# Altium PCB er9x.PcbDoc (part 2 of 2)
Units mm, origin at the board's own origin, x right, y up, seen from the top; angles counter-clockwise.
Board outline 182 x 126 mm, 2 copper layers (Top Layer, Bottom Layer); 144 components, 111 nets, 454 pads, 137 vias.
Unrouted connection lines stored in the file: 3.
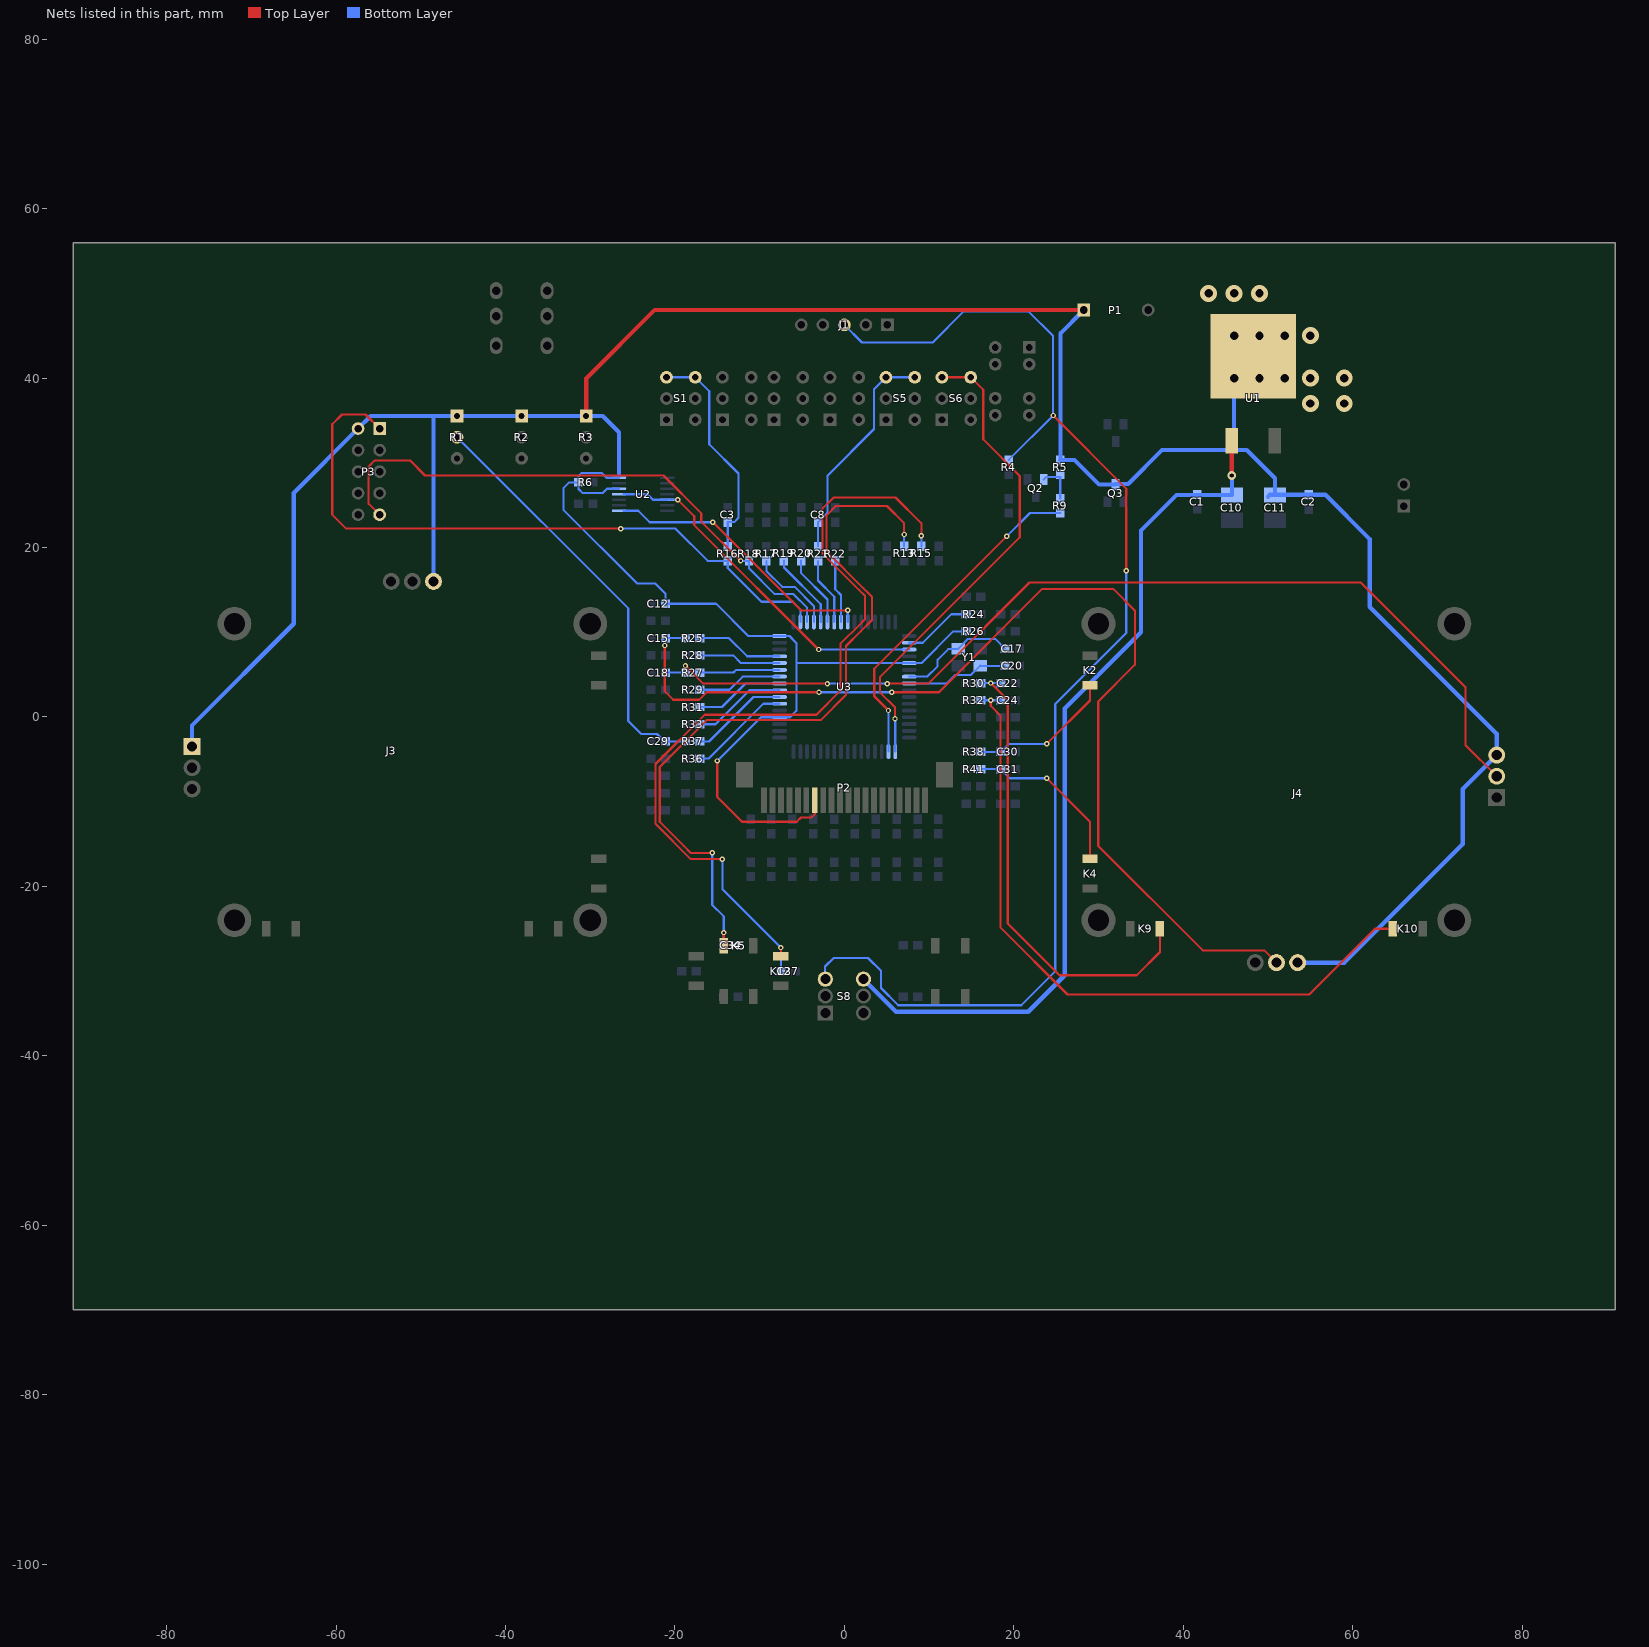
[diagram p2: the nets of this part, all layers, seen from the top]

## Via types
v1: diameter 0.635, hole 0.305, Top Layer to Bottom Layer, 83 vias
v2: diameter 0.635, hole 0.305, Top Layer to Bottom Layer, tented both sides, 33 vias
v3: diameter 2, hole 1, Top Layer to Bottom Layer, tented both sides, 13 vias
v4: diameter 4, hole 3, Top Layer to Bottom Layer, 4 vias
v5: diameter 2, hole 1.7, Top Layer to Bottom Layer, 2 vias
v6: diameter 1.016, hole 0.508, Top Layer to Bottom Layer, 1 vias
v7: diameter 2, hole 1, Top Layer to Bottom Layer, 1 vias

## Nets (pads, with @x,y where several pads share a name; then routed paths per layer and width w, separated by ;. In a path a pad name is that pad's centre, name@x,y a point inside that pad or via, vN(x,y) a via of type N, cw(c..) or ccw(c..) an arc to the next point about the centre after c; other vN are vias at no path point) (continued)
PE0: P3.1 R16.1 U3.2 | length 79.3
  Top Layer w0.254: P3.1@-54.864,34.036 -56.52,35.692 -59.304,35.692 -60.452,34.544 -60.452,23.876 -58.801,22.225 v1(-26.416,22.225)
  Bottom Layer w0.254: v1(-26.416,22.225) -19.939,22.225 -16.136,18.422 R16.1@-13.772,18.422 -13.772,17.582 -9.779,13.589 -6.096,13.589 -5.2,12.693 U3.2@-5.2,11.206
PE1: P3.9 R18.1 U3.3 | length 68.3
  Top Layer w0.254: P3.9@-54.864,23.876 -56.159,25.171 -56.159,29.565 -55.438,30.286 -51.286,30.286 -49.5,28.5 -21.363,28.5 -16.891,24.028 -16.891,23.06 v1(-12.257,18.426)
  Bottom Layer w0.254: v1(-12.257,18.426) R18.1@-11.261,18.426 -11.261,17.535 -8.226,14.5 -6,14.5 -4.4,12.9 U3.3@-4.4,11.206
PE2: R17.1 U3.4 | length 10.4
  Bottom Layer w0.254: R17.1@-9.204,18.426 -9.204,17.204 -7.353,15.353 -5.853,15.353 -3.6,13.1 U3.4@-3.6,11.206
PE3: R19.1 U3.5 | length 9
  Bottom Layer w0.254: R19.1@-7.136,18.454 -7.136,17.636 -2.8,13.3 U3.5@-2.8,11.206
PE4: R20.1 U3.6 | length 8.5
  Bottom Layer w0.254: R20.1@-5.104,18.454 -5.104,16.971 -2,13.867 U3.6@-2,11.206
PE5: R21.1 U3.7 | length 8
  Bottom Layer w0.254: R21.1@-3.108,18.426 -3.108,16.108 -1.2,14.2 U3.7@-1.2,11.206
PE6: R22.1 U3.8 | length 7.5
  Bottom Layer w0.254: R22.1@-1.076,18.426 -1.076,15.076 -0.4,14.4 U3.8@-0.4,11.206
PE7: U2.8 U3.9 | length 32.7
  Top Layer w0.254: v1(-15.519,22.987) -5.105,12.573 v1(0.381,12.573)
  Bottom Layer w0.254: U2.8@-26.091,24.339 -24.339,24.339 -22.987,22.987 v1(-15.519,22.987) ; v1(0.381,12.573) 0.4,12.554 U3.9@0.4,11.206
PF0: R25.1 U3.61 | length 10.3
  Bottom Layer w0.254: R25.1@-17.062,9.3 -13.618,9.3 -11.474,7.156 U3.61@-7.65,7.156
PF1: R28.1 U3.60 | length 9.8
  Bottom Layer w0.254: R28.1@-17.062,7.268 -13.11,7.268 -12.198,6.356 U3.60@-7.65,6.356
PF2: R27.1 U3.59 | length 9.5
  Bottom Layer w0.254: R27.1@-17.062,5.236 -13.081,5.236 -12.761,5.556 U3.59@-7.65,5.556
PF3: R29.1 U3.58 | length 10.1
  Bottom Layer w0.254: R29.1@-17.062,3.204 -13.56,3.204 -12.008,4.756 U3.58@-7.65,4.756
PF4: R31.1 U3.57 | length 10.6
  Bottom Layer w0.254: R31.1@-17.062,1.172 -14.449,1.172 -11.665,3.956 U3.57@-7.65,3.956
PF5: R33.1 U3.56 | length 11.1
  Bottom Layer w0.254: R33.1@-17.062,-0.86 -15.211,-0.86 -11.195,3.156 U3.56@-7.65,3.156
PF6: R37.1 U3.55 | length 11.6
  Bottom Layer w0.254: R37.1@-17.062,-2.892 -15.973,-2.892 -10.725,2.356 U3.55@-7.65,2.356
PF7: R36.1 U3.54 | length 12.1
  Bottom Layer w0.254: R36.1@-17.062,-4.924 -16.049,-4.924 -9.569,1.556 U3.54@-7.65,1.556
PG0: S6.3 U3.33 | length 57.6
  Top Layer w0.254: v1(5.969,-0.223) 5.969,1.143 4.191,2.921 4.191,4.699 20.701,21.209 20.701,28.448 16.383,32.766 16.383,38.617 S6.3@14.908,40.092 S6.3@11.508,40.092
  Bottom Layer w0.254: v1(5.969,-0.223) v1@6,-0.254 ; U3.33@6,-4.094 v1@6,-0.254 ; v1@6,-0.223 v1@6,-0.254
PG1: R9.2 U3.34 | length 40.1
  Top Layer w0.254: 3.524,2.406 3.524,5.683 ; 3.524,5.715 3.524,5.683 ; 3.556,2.406 v1(5.2,0.762) ; v1(19.177,21.336) 3.524,5.683
  Bottom Layer w0.254: U3.34@5.2,-4.094 v1(5.2,0.762) ; v1(19.177,21.336) 21.909,24.068 R9.2@25.488,24.068
PG3: R24.2 U3.18 | length 8.1
  Bottom Layer w0.254: U3.18@7.65,8.756 9.256,8.756 12.628,12.128 R24.2@14.39,12.128
PG4: U2.5 U2.11 U3.19 | length 42
  Top Layer w0.254: v1(-19.685,25.654) -17.729,23.698 -17.729,22.637 v1(-3.048,7.956)
  Bottom Layer w0.254: U2.11@-26.091,26.289 -23.241,26.289 -22.591,25.639 U2.5@-20.899,25.639 ; U2.5@-20.899,25.654 U2.5@-20.406,25.654 ; U2.5@-20.391,25.639 U2.5@-20.406,25.654 ; v1(-19.685,25.654) U2.5@-20.406,25.654 ; v1(-3.048,7.956) U3.19@7.65,7.956
PITTRIM: C29.1 R1.2 R37.2 | length 49.6
  Bottom Layer w0.254: R1.2@-45.72,33.02 -25.516,12.816 -25.516,-0.484 -23.989,-2.011 -22.118,-2.011 -21.237,-2.892 C29.1@-21.126,-2.892 R37.2@-18.762,-2.892
RF_IN: Q2.2 R5.2 R9.1 | length 4.6
  Bottom Layer w0.254: Q2.2@23.533,28.026 23.827,28.321 25.488,28.321 R9.1@25.488,25.768
RF_PWR: J1.3 R4.2 S8.3 | length 152
  Top Layer w0.254: v1(24.638,35.586) 33.274,26.95 v1(33.274,17.272)
  Bottom Layer w0.254: S8.3@-2.286,-30.988 -2.286,-29.464 -1.27,-28.448 2.794,-28.448 4.318,-29.972 4.318,-32.004 6.35,-34.036 20.889,-34.036 24.892,-30.033 24.892,1.524 33.274,9.906 v1(33.274,17.272) ; J1.3@0,46.279 2.083,44.196 10.414,44.196 14.097,47.879 21.717,47.879 24.638,44.958 v1(24.638,35.586) R4.2@19.392,30.34
RHSTICK: C15.1 J4.5 R25.2 | length 127.4
  Top Layer w0.254: v1(-21.209,8.436) -21.209,3.048 -20.197,2.036 -17.145,2.036 -16.26,2.921 v1(-3,2.921) ; v1(5.588,2.921) 11.176,2.921 23.368,15.113 31.75,15.113 34.29,12.573 34.29,6.147 29.972,1.829 29.972,-15.24 42.291,-27.559 49.559,-27.559 J4.5@51,-29
  Bottom Layer w0.254: v1(-21.209,8.436) -21.209,9.217 C15.1@-21.126,9.3 R25.2@-18.762,9.3 ; v1(-3,2.921) v1(5.588,2.921)
RHTRIMDWN: C24.1 K10.1 R32.2 | length 82.5
  Top Layer w0.254: v1(17.272,1.968) 17.272,1.321 18.415,0.178 18.415,-24.841 26.34,-32.766 54.864,-32.766 62.63,-25 K10.1@64.75,-25
  Bottom Layer w0.254: R32.2@16.09,1.968 v1(17.272,1.968) C24.1@18.454,1.968
RHTRIMUP: C22.1 K9.2 R30.2 | length 56
  Top Layer w0.254: v1(17.272,4) 19.279,1.993 19.279,-24.384 25.395,-30.5 34.5,-30.5 37.25,-27.75 K9.2@37.25,-25
  Bottom Layer w0.254: R30.2@16.09,4 v1(17.272,4) C22.1@18.454,4
RIGHT: C37.2 K12.1 R15.1 | length 101.8
  Top Layer w0.254: v1(-14.402,-16.786) -18.117,-16.786 -22.301,-12.602 -22.301,-5.559 -16.488,0.254 -3.302,0.254 -0.476,3.08 -0.476,8.624 1.8,10.9 ; K12.1@-7.5,-28.25 v1(-7.5,-27.222) ; 2.3,11.4 1.8,10.9 ; 2.3,14.42 1.756,14.964 ; v1(9.088,21.392) 9.088,22.86 6.04,25.908 -1.27,25.908 -2.6,24.578 -2.6,19.32 1.756,14.964 ; 1.756,14.964 2.434,14.286 2.434,11.534 1.8,10.9
  Bottom Layer w0.254: v1(-14.402,-16.786) -14.402,-20.32 v1(-7.5,-27.222) -7.5,-29.926 C37.2@-7.378,-30.048 ; R15.1@9.088,20.154 v1(9.088,21.392)
RVSTICK: C18.1 J4.2 R27.2 | length 118.2
  Top Layer w0.254: v1(-18.762,6.04) -16.659,3.937 v1(-2,3.937) ; v1(5.08,3.937) 9.906,3.937 21.844,15.875 60.96,15.875 73.304,3.531 73.304,-3.304 J4.2@77,-7
  Bottom Layer w0.254: C18.1@-21.126,5.236 R27.2@-18.762,5.236 v1(-18.762,6.04) ; v1(-2,3.937) v1(5.08,3.937)
RVTRIMDWN: C31.1 K4.2 R41.2 | length 19.9
  Top Layer w0.254: v1(23.876,-7.239) 29,-12.363 K4.2@29,-16.75
  Bottom Layer w0.254: R41.2@16.09,-6.16 C31.1@18.454,-6.16 19.533,-7.239 v1(23.876,-7.239)
RVTRIMUP: C30.1 K2.1 R38.2 | length 17.2
  Top Layer w0.254: v1(23.876,-3.175) 29,1.949 K2.1@29,3.75
  Bottom Layer w0.254: R38.2@16.09,-4.128 C30.1@18.454,-4.128 19.407,-3.175 v1(23.876,-3.175)
TCUTSW: C3.1 R16.2 S1.3 | length 26.5
  Bottom Layer w0.254: S1.3@-21.004,40.092 S1.3@-17.604,40.092 -15.951,38.439 -15.951,32.187 -12.497,28.732 -12.497,23.495 -12.998,22.994 C3.1@-13.665,22.994 ; R16.2@-13.772,20.122 -13.772,22.887 C3.1@-13.665,22.994 ; C3.1@-13.772,22.994 C3.1@-13.665,22.994
TRAINSW: C8.1 R21.2 S5.3 | length 26.7
  Bottom Layer w0.254: R21.2@-3.104,20.13 C8.1@-3.104,22.994 -2,24.098 -2,28.48 3.5,33.98 3.5,38.688 S5.3@4.904,40.092 S5.3@8.304,40.092
UP: C34.2 K5.1 R13.1 | length 92.5
  Top Layer w0.254: v1(-15.596,-16.053) -18.132,-16.053 -18.982,-15.203 -21.793,-12.391 -21.793,-5.918 -16.256,-0.381 -2.794,-0.381 0.191,2.603 0.191,8.364 1.946,10.12 ; K5.1@-14.25,-27 v1(-14.25,-25.451) ; 2.808,10.982 1.946,10.12 ; 2.808,14.631 2.242,15.196 ; v1(7.056,21.534) 7.056,22.86 5.024,24.892 -1.016,24.892 -2.092,23.816 -2.092,19.531 2.242,15.196 ; 1.946,10.12 3.268,11.442 3.268,14.171 2.242,15.196
  Bottom Layer w0.254: v1(-15.596,-16.053) -15.596,-22.2 -14.25,-23.545 v1(-14.25,-25.451) ; C34.2@-14.261,-26.924 v1@-14.261,-25.463 ; R13.1@7.056,20.154 v1(7.056,21.534)
VBAT: C1.1 C10.1 S8.6 U1.1 | length 102.5
  Top Layer w0.508: v6(45.72,28.5) U1.1@45.72,32.592
  Bottom Layer w0.508: S8.6@2,-31 2.101,-31.101 2.399,-31.101 6.096,-34.798 21.702,-34.798 26,-30.5 26,1 35,10 35,22 39.208,26.208 C10.1@45.749,26.208 45.749,28.471 v6(45.72,28.5)
VCC: C2.1 C11.1 C12.1 J3.1 J3.6 J4.3 J4.4 P1.1 P2.7 P3.2 Q3.3 R1.1 R2.1 R3.1 R5.1 R6.1 R26.2 U1.2 U2.12 U2.14 U3.21 U3.52 U3.64 | length 423.1
  Top Layer w0.254: v1(-15,-5.196) -15,-9.46 -12.09,-12.37 -5.611,-12.37 -5.115,-11.874 -3.899,-11.874 -3.5,-11.476 P2.7@-3.5,-9.831
  Top Layer w0.508: R3.1@-30.48,35.52 -30.48,39.954 -22.403,48.031 P1.1@28.255,48.031
  Bottom Layer w0.254: -28.245,28.397 -28.384,28.537 ; U2.12@-26.599,26.939 -28.027,26.939 -28.55,26.416 -30.886,26.416 -31.378,26.908 R6.1@-31.378,27.686 ; U2.14@-26.599,28.239 -28.087,28.239 -28.384,28.537 ; v1(-15,-5.196) -9.848,-0.044 U3.52@-7.65,-0.044 -6.419,-0.044 -5.664,0.711 -5.664,6.413 -5.664,8.738 -6.483,9.556 U3.64@-7.65,9.556 -11.334,9.556 -15.142,13.364 C12.1@-21.126,13.364 -21.126,14.547 -22.327,15.748 -24.46,15.748 -33.172,24.46 -33.172,26.987 -32.474,27.686 R6.1@-31.378,27.686 ; -5.607,6.356 U3.21@7.65,6.356 9.106,6.356 12.846,10.096 R26.2@14.39,10.096 ; R6.1@-31.378,27.686 -31.378,28.42 -30.988,28.81 -28.658,28.81 -28.384,28.537
  Bottom Layer w0.508: J3.1@-77,-3.5 -77,-1 -65,11 -65,26.44 P3.2@-57.404,34.036 -55.92,35.52 -48.5,35.52 ; J3.6@-48.5,16 -48.5,35.52 ; -26.599,28.448 -26.599,33.599 -28.52,35.52 R3.1@-30.48,35.52 R2.1@-38.1,35.52 R1.1@-45.72,35.52 -48.5,35.52 ; R5.1@25.488,30.34 R5.1@25.5,30.34 ; P1.1@28.255,48.031 25.5,45.277 R5.1@25.5,30.34 ; Q3.3@31.991,27.432 30.068,27.432 27.16,30.34 R5.1@25.5,30.34 ; Q3.3@32,27.5 33.5,27.5 37.5,31.5 45.974,31.5 ; v3(46,40) 46,31.526 45.974,31.5 ; C11.1@50,26 50.225,26.225 C11.1@50.829,26.225 ; C11.1@50.829,26.208 C11.1@50.829,26.225 ; J4.4@53.5,-29 59,-29 73,-15 73,-8.5 J4.3@77,-4.5 77,-2 62,13 62,21 56.775,26.225 54.896,26.225 C2.1@54.828,26.225 C11.1@50.829,26.225 ; 45.974,31.5 47.5,31.5 50.829,28.171 C11.1@50.829,26.225
  other v3: 55,37 59,37 49,40 52,40 55,40 59,40 49,45 52,45 55,45 43,50 46,50 49,50
  other v7: 46,45
X1: C20.1 U3.24 Y1.1 | length 12.2
  Bottom Layer w0.254: U3.24@7.65,3.956 12.084,3.956 13.095,4.967 14.951,4.967 Y1.1@16.032,6.048 ; Y1.1@16.048,6.032 C20.1@18.962,6.032
X2: C17.2 U3.23 Y1.3 | length 14.1
  Bottom Layer w0.254: U3.23@7.65,4.756 9.756,4.756 11,6 11,6.75 12.25,8 13.384,8 Y1.3@13.432,8.048 14.599,9.215 17.811,9.215 C17.2@18.962,8.064
pads on no net: J2.2 J3.0 J4.0 P2.0 P2.1 P2.2 P2.3 P2.4 S1.1 S2.1 S3.1 S4.1 S5.1 S6.1 S7.3 S8.1 U3.1 U3.35 U3.41 U3.42 U3.43 Y1.2 Y1.4
copper on no net: | length 13.9
  Bottom Layer w0.254: 34.103,10.001 34.103,23.943
  other v4: -22.652,-16.425 22.348,-16.425 -22.652,18.575 22.348,18.575
  other v5: -38.1,43.824 -38.1,49.824

## Polygon pours and split planes (outlines as drawn)
GND on Top Layer "Mid-Layer 2-No Net" (solid, remove dead copper, pour order 1000): -91,-70 91,-70 91,56 -91,56
VCC on Top Layer "Mid-Layer 2-No Net" (solid, remove dead copper, pour order 1001): 41,55 69,55 69,35 41,35 41,55
GND on Bottom Layer "Mid-Layer 2-No Net" (solid, remove dead copper, pour order 1002): -91,-70 91,-70 91,56 -91,56
VCC on Bottom Layer "Mid-Layer 2-No Net" (solid, remove dead copper, pour order 1003): 41,55 69,55 69,35 41,35 41,55
VCC on Top Solder "Mid-Layer 2-No Net" (solid): 41,55 69,55 69,35 41,35 41,55
VCC on Bottom Solder "Mid-Layer 2-No Net" (solid): 41,55 69,55 69,35 41,35 41,55

## Keep-outs
Keep-Out Layer:
  circle w0.064: c-90.291,-70.115 r0.032
  lines w0.127: -89.968,-45.702 -89.965,-46.057 -89.96,-46.411 -89.952,-46.765 -89.941,-47.12 -89.927,-47.473 -89.911,-47.827 -89.892,-48.18 -89.869,-48.533 -89.844,-48.886 -89.816,-49.238 -89.784,-49.59 -89.749,-49.941 -89.711,-50.292 -89.67,-50.643 -89.625,-50.994 -89.577,-51.343 -89.525,-51.693 -89.47,-52.042 -89.411,-52.39 -89.348,-52.739 -89.282,-53.086 -89.212,-53.433 -89.138,-53.779 -89.06,-54.125 -88.978,-54.47 -88.892,-54.814 -88.802,-55.157 -88.708,-55.499 -88.61,-55.84 -88.507,-56.18 -88.401,-56.519 -88.29,-56.857 -88.175,-57.194 -88.055,-57.529 -87.931,-57.863 -87.802,-58.195 -87.669,-58.526 -87.531,-58.855 -87.389,-59.183 -87.242,-59.509 -87.09,-59.834 -86.933,-60.156 -86.772,-60.477 -86.605,-60.796 -86.434,-61.113 -86.257,-61.427 -86.076,-61.74 -85.889,-62.051 -85.698,-62.359 -85.501,-62.665 -85.299,-62.968 -85.092,-63.267 -84.88,-63.563 -84.662,-63.856 -84.44,-64.144 -84.213,-64.429 -83.98,-64.708 -83.743,-64.983 -83.501,-65.252 -83.253,-65.516 -83.001,-65.774 -82.743,-66.026 -82.481,-66.272 -82.214,-66.511 -81.942,-66.743 -81.665,-66.968 -81.383,-67.185 -81.096,-67.395 -80.804,-67.596 -80.508,-67.789 -80.206,-67.974 -79.9,-68.149 -79.589,-68.315 -79.273,-68.472 -78.952,-68.618 -78.627,-68.755 -78.298,-68.883 -77.964,-69.001 -77.627,-69.109 -77.286,-69.208 -76.942,-69.298 -76.595,-69.379 -76.245,-69.452 -75.892,-69.515 -75.538,-69.57 -75.181,-69.616 -74.822,-69.653 -74.462,-69.683 -74.101,-69.704 -73.738,-69.717 -73.375,-69.722 -73.011,-69.719 -72.646,-69.709 -72.282,-69.691 -71.918,-69.665 -71.554,-69.632 -71.191,-69.592 -70.829,-69.545 -70.468,-69.49 -70.109,-69.428 -69.752,-69.359 -69.397,-69.283 -69.044,-69.199 -68.695,-69.107 -68.349,-69.007 -68.007,-68.899 -67.669,-68.783 -67.336,-68.658 -67.007,-68.525 -66.684,-68.383 -66.367,-68.232 -66.056,-68.072 -65.751,-67.902 -65.453,-67.724 -65.163,-67.536 -64.879,-67.338 -64.603,-67.132 -64.332,-66.917 -64.068,-66.694 -63.811,-66.463 -63.559,-66.224 -63.312,-65.978 -63.071,-65.726 -62.835,-65.467 -62.603,-65.202 -62.377,-64.931 -62.154,-64.654 -61.936,-64.373 -61.721,-64.087 -61.51,-63.796 -61.302,-63.501 -61.097,-63.203 -60.895,-62.901 -60.696,-62.597 -60.499,-62.289 -60.304,-61.979 -60.111,-61.668 -59.919,-61.354 -59.728,-61.04 -59.539,-60.724 -59.35,-60.408 -59.162,-60.092 -58.974,-59.776 -58.787,-59.46 -58.599,-59.145 -58.41,-58.832 -58.221,-58.52 -58.031,-58.209 -57.841,-57.9 -57.649,-57.592 -57.457,-57.286 -57.264,-56.981 -57.07,-56.678 -56.875,-56.376 -56.679,-56.075 -56.483,-55.776 -56.285,-55.479 -56.087,-55.182 -55.887,-54.887 -55.687,-54.593 -55.486,-54.301 -55.284,-54.01 -55.08,-53.72 -54.876,-53.431 -54.671,-53.143 -54.464,-52.857 -54.257,-52.572 -54.048,-52.288 -53.839,-52.005 -53.628,-51.723 -53.416,-51.442 -53.203,-51.163 -52.989,-50.884 -52.773,-50.606 -52.556,-50.33 -52.339,-50.054 -52.119,-49.78 -51.899,-49.506 -51.677,-49.233 -51.455,-48.961 -51.23,-48.69 -51.005,-48.42 -50.778,-48.151 -50.55,-47.883 -50.32,-47.615 -50.089,-47.349 -49.857,-47.083 -49.623,-46.818 -49.388,-46.554 -49.151,-46.291 -48.912,-46.029 -48.672,-45.769 -48.431,-45.51 -48.187,-45.252 -47.942,-44.995 -47.696,-44.74 -47.447,-44.487 -47.197,-44.235 -46.945,-43.985 -46.691,-43.736 -46.435,-43.489 -46.178,-43.244 -45.918,-43.001 -45.656,-42.76 -45.393,-42.521 -45.127,-42.284 -44.859,-42.049 -44.59,-41.817 -44.318,-41.586 -44.043,-41.359 -43.767,-41.133 -43.488,-40.91 -43.207,-40.689 -42.924,-40.471 -42.639,-40.256 -42.351,-40.043 -42.06,-39.834 -41.768,-39.627 -41.472,-39.423 -41.175,-39.222 -40.874,-39.025 -40.572,-38.832 -40.267,-38.643 -39.959,-38.459 -39.649,-38.28 -39.337,-38.106 -39.022,-37.939 -38.705,-37.777 -38.385,-37.622 -38.063,-37.473 -37.738,-37.332 -37.412,-37.198 -37.082,-37.072 -36.75,-36.955 -36.416,-36.846 -36.08,-36.746 -35.741,-36.655 -35.4,-36.572 -35.057,-36.497 -34.712,-36.429 -34.365,-36.368 -34.017,-36.314 -33.667,-36.266 -33.315,-36.224 -32.962,-36.187 -32.608,-36.154 -32.252,-36.126 -31.896,-36.103 -31.538,-36.082 -31.18,-36.065 -30.821,-36.05 -30.462,-36.037 -30.102,-36.026 -29.742,-36.017 -29.381,-36.008 -29.02,-36 0,-36 29.02,-36 29.381,-36.008 29.741,-36.017 30.102,-36.026 30.462,-36.037 30.821,-36.05 31.18,-36.065 31.538,-36.082 31.896,-36.103 32.252,-36.126 32.608,-36.154 32.962,-36.187 33.315,-36.224 33.666,-36.266 34.017,-36.314 34.365,-36.368 34.712,-36.429 35.057,-36.497 35.4,-36.572 35.741,-36.655 36.08,-36.746 36.416,-36.846 36.75,-36.955 37.082,-37.072 37.411,-37.198 37.738,-37.332 38.063,-37.473 38.385,-37.622 38.705,-37.777 39.022,-37.939 39.337,-38.106 39.649,-38.28 39.959,-38.459 40.267,-38.643 40.572,-38.832 40.874,-39.025 41.175,-39.222 41.472,-39.423 41.767,-39.627 42.06,-39.834 42.351,-40.043 42.639,-40.256 42.924,-40.471 43.207,-40.689 43.488,-40.91 43.767,-41.133 44.043,-41.359 44.317,-41.586 44.589,-41.817 44.859,-42.049 45.127,-42.284 45.393,-42.521 45.656,-42.76 45.918,-43.001 46.178,-43.244 46.435,-43.489 46.691,-43.736 46.945,-43.985 47.197,-44.235 47.447,-44.487 47.696,-44.74 47.942,-44.995 48.187,-45.252 48.43,-45.51 48.672,-45.769 48.912,-46.029 49.151,-46.291 49.387,-46.554 49.623,-46.818 49.857,-47.083 50.089,-47.349 50.32,-47.615 50.55,-47.883 50.778,-48.151 51.005,-48.42 51.23,-48.69 51.454,-48.961 51.677,-49.233 51.899,-49.506 52.119,-49.78 52.338,-50.054 52.556,-50.33 52.773,-50.606 52.988,-50.884 53.203,-51.163 53.416,-51.442 53.628,-51.723 53.838,-52.005 54.048,-52.288 54.257,-52.572 54.464,-52.857 54.671,-53.143 54.876,-53.431 55.08,-53.72 55.283,-54.01 55.486,-54.301 55.687,-54.593 55.887,-54.887 56.087,-55.182 56.285,-55.479 56.483,-55.776 56.679,-56.075 56.875,-56.376 57.07,-56.678 57.264,-56.981 57.457,-57.286 57.649,-57.592 57.84,-57.9 58.031,-58.209 58.221,-58.52 58.41,-58.832 58.599,-59.145 58.787,-59.46 58.974,-59.776 59.162,-60.092 59.35,-60.408 59.539,-60.724 59.728,-61.04 59.919,-61.354 60.11,-61.668 60.304,-61.979 60.499,-62.289 60.696,-62.597 60.895,-62.901 61.097,-63.203 61.302,-63.501 61.51,-63.796 61.721,-64.087 61.936,-64.373 62.154,-64.654 62.376,-64.931 62.603,-65.202 62.835,-65.467 63.071,-65.726 63.312,-65.978 63.558,-66.224 63.81,-66.463 64.068,-66.694 64.332,-66.917 64.602,-67.132 64.879,-67.338 65.163,-67.536 65.453,-67.724 65.751,-67.902 66.056,-68.072 66.367,-68.232 66.684,-68.383 67.007,-68.525 67.336,-68.658 67.669,-68.783 68.007,-68.899 68.349,-69.007 68.695,-69.107 69.044,-69.199 69.396,-69.283 69.752,-69.359 70.109,-69.428 70.468,-69.49 70.829,-69.545 71.191,-69.592 71.554,-69.632 71.918,-69.665 72.282,-69.691 72.646,-69.709 73.011,-69.719 73.374,-69.722 73.738,-69.717 74.1,-69.704 74.462,-69.683 74.822,-69.653 75.181,-69.616 75.538,-69.57 75.892,-69.515 76.245,-69.452 76.595,-69.379 76.942,-69.298 77.286,-69.208 77.627,-69.109 77.964,-69.001 78.298,-68.883 78.627,-68.755 78.952,-68.618 79.273,-68.472 79.589,-68.315 79.9,-68.149 80.206,-67.974 80.508,-67.789 80.804,-67.596 81.096,-67.395 81.383,-67.185 81.665,-66.968 81.942,-66.743 82.214,-66.511 82.481,-66.272 82.743,-66.026 83.001,-65.774 83.253,-65.516 83.5,-65.252 83.743,-64.983 83.98,-64.708 84.213,-64.429 84.44,-64.144 84.662,-63.856 84.879,-63.563 85.092,-63.267 85.299,-62.968 85.501,-62.665 85.697,-62.359 85.889,-62.051 86.076,-61.74 86.257,-61.427 86.434,-61.113 86.605,-60.796 86.772,-60.477 86.933,-60.156 87.09,-59.834 87.242,-59.509 87.389,-59.183 87.531,-58.855 87.669,-58.526 87.802,-58.195 87.931,-57.863 88.055,-57.529 88.175,-57.194 88.29,-56.857 88.401,-56.519 88.507,-56.18 88.61,-55.84 88.708,-55.499 88.802,-55.157 88.892,-54.814 88.978,-54.47 89.059,-54.125 89.137,-53.779 89.211,-53.433 89.282,-53.086 89.348,-52.739 89.411,-52.39 89.47,-52.042 89.525,-51.693 89.577,-51.343 89.625,-50.994 89.67,-50.643 89.711,-50.292 89.749,-49.941 89.784,-49.59 89.816,-49.238 89.844,-48.886 89.869,-48.533 89.892,-48.18 89.911,-47.827 89.927,-47.473 89.941,-47.12 89.952,-46.765 89.96,-46.411 89.965,-46.057 89.968,-45.702 89.968,-45.347 89.966,-44.992 89.961,-44.636 89.954,-44.281 89.944,-43.925 89.933,-43.569 89.919,-43.213 89.903,-42.857 89.885,-42.5 89.865,-42.144 89.843,-41.788 89.819,-41.431 89.793,-41.075 89.765,-40.718 89.736,-40.362 89.705,-40.005 89.673,-39.648 89.639,-39.292 89.603,-38.935 89.566,-38.579 89.528,-38.222 89.488,-37.866 89.447,-37.51 89.405,-37.154 89.362,-36.798 89.318,-36.442 89.273,-36.086 89.227,-35.731 89.18,-35.375 89.132,-35.02 89.084,-34.665 89.034,-34.31 88.984,-33.955 88.934,-33.601 88.883,-33.247 88.832,-32.893 88.78,-32.54 88.727,-32.186 88.674,-31.833 88.621,-31.481 88.567,-31.128 88.513,-30.776 88.458,-30.424 88.403,-30.072 88.347,-29.72 88.29,-29.369 88.234,-29.018 88.176,-28.667 88.118,-28.317 88.06,-27.966 88.001,-27.616 87.942,-27.266 87.882,-26.916 87.821,-26.567 87.76,-26.217 87.698,-25.868 87.636,-25.519 87.573,-25.171 87.51,-24.822 87.446,-24.474 87.382,-24.126 87.317,-23.778 87.252,-23.43 87.186,-23.082 87.119,-22.735 87.052,-22.387 86.984,-22.04 86.915,-21.693 86.846,-21.347 86.777,-21 86.707,-20.653 86.636,-20.307 86.564,-19.961 86.492,-19.615 86.42,-19.269 86.346,-18.923 86.273,-18.578 86.198,-18.232 86.123,-17.887 86.047,-17.542 85.971,-17.197 85.894,-16.852 85.816,-16.507 85.738,-16.162 85.659,-15.817 85.579,-15.473 85.499,-15.129 85.418,-14.784 85.337,-14.44 85.255,-14.096 85.172,-13.752 85.089,-13.408 85.005,-13.064 84.92,-12.721 84.835,-12.377 84.75,-12.034 84.664,-11.691 84.577,-11.347 84.49,-11.004 84.402,-10.661 84.313,-10.319 84.225,-9.976 84.135,-9.633 84.045,-9.291 83.955,-8.948 83.863,-8.606 83.772,-8.263 83.68,-7.921 83.587,-7.579 83.494,-7.237 83.401,-6.895 83.307,-6.554 83.212,-6.212 83.117,-5.87 83.021,-5.529 82.925,-5.187 82.829,-4.846 82.732,-4.505 82.635,-4.164 82.537,-3.823 82.439,-3.482 82.34,-3.141 82.241,-2.8 82.141,-2.46 82.041,-2.119 81.941,-1.779 81.84,-1.438 81.739,-1.098 81.637,-0.758 81.535,-0.418 81.433,-0.078 81.33,0.262 81.227,0.602 81.124,0.942 81.02,1.282 80.915,1.621 80.811,1.961 80.706,2.3 80.601,2.64 80.495,2.979 80.389,3.318 80.283,3.658 80.176,3.997 80.069,4.336 79.962,4.675 79.854,5.013 79.746,5.352 79.638,5.691 79.529,6.03 79.421,6.368 79.311,6.707 79.202,7.045 79.092,7.383 78.983,7.722 78.872,8.06 78.762,8.398 78.651,8.736 78.54,9.074 78.429,9.412 78.318,9.75 78.206,10.088 78.094,10.426 77.982,10.763 77.87,11.101 77.757,11.438 77.644,11.776 77.53,12.113 77.417,12.45 77.302,12.787 77.188,13.124 77.073,13.461 76.958,13.797 76.842,14.133 76.726,14.47 76.609,14.806 76.492,15.141 76.374,15.477 76.256,15.812 76.138,16.148 76.018,16.482 75.899,16.817 75.778,17.152 75.657,17.486 75.536,17.82 75.414,18.154 75.291,18.487 75.168,18.82 75.044,19.153 74.919,19.485 74.794,19.818 74.667,20.15 74.541,20.481 74.413,20.812 74.285,21.143 74.156,21.474 74.026,21.804 73.895,22.134 73.764,22.463 73.631,22.792 73.498,23.121 73.364,23.449 73.229,23.777 73.093,24.105 72.956,24.432 72.819,24.758 72.68,25.085 72.541,25.41 72.4,25.735 72.259,26.06 72.116,26.385 71.973,26.708 71.828,27.032 71.682,27.355 71.536,27.677 71.388,27.999 71.239,28.32 71.089,28.641 70.938,28.961 70.786,29.281 70.632,29.6 70.478,29.918 70.322,30.236 70.165,30.554 70.007,30.87 69.847,31.187 69.687,31.502 69.525,31.817 69.362,32.132 69.197,32.445 69.031,32.758 68.864,33.07 68.695,33.382 68.525,33.693 68.354,34.003 68.181,34.312 68.006,34.621 67.83,34.928 67.653,35.235 67.474,35.541 67.294,35.846 67.111,36.151 66.928,36.454 66.742,36.757 66.555,37.058 66.367,37.359 66.176,37.658 65.984,37.957 65.791,38.254 65.595,38.551 65.398,38.846 65.199,39.14 64.998,39.434 64.795,39.726 64.59,40.017 64.383,40.306 64.175,40.595 63.964,40.883 63.752,41.169 63.538,41.454 63.321,41.738 63.103,42.02 62.882,42.301 62.66,42.581 62.435,42.86 62.208,43.137 61.979,43.413 61.748,43.687 61.515,43.96 61.28,44.231 61.042,44.501 60.802,44.769 60.56,45.035 60.316,45.298 60.07,45.56 59.821,45.82 59.57,46.077 59.317,46.332 59.062,46.584 58.805,46.834 58.545,47.082 58.283,47.327 58.018,47.568 57.752,47.807 57.483,48.043 57.211,48.276 56.938,48.506 56.662,48.733 56.383,48.956 56.103,49.176 55.82,49.392 55.534,49.604 55.247,49.813 54.957,50.019 54.664,50.22 54.369,50.417 54.072,50.61 53.772,50.8 53.47,50.984 53.165,51.165 52.858,51.341 52.549,51.513 52.237,51.68 51.922,51.842 51.605,52 51.286,52.153 50.964,52.301 50.64,52.444 50.314,52.583 49.986,52.718 49.655,52.848 49.323,52.973 48.989,53.094 48.653,53.211 48.315,53.324 47.976,53.432 47.635,53.536 47.292,53.636 46.948,53.732 46.603,53.823 46.256,53.911 45.908,53.995 45.559,54.075 45.209,54.151 44.857,54.223 44.505,54.292 44.152,54.357 43.798,54.418 43.444,54.475 43.089,54.529 42.733,54.58 42.377,54.627 42.02,54.67 41.663,54.711 41.306,54.748 40.948,54.781 40.591,54.812 40.233,54.839 39.875,54.863 39.518,54.884 39.16,54.902 38.803,54.917 38.446,54.93 38.09,54.939 37.734,54.945 37.378,54.949 37.022,54.95 36.667,54.949 36.312,54.945 35.957,54.939 35.602,54.93 35.248,54.919 34.894,54.905 34.54,54.89 34.186,54.872 33.833,54.852 33.48,54.83 33.127,54.806 32.774,54.781 32.421,54.753 32.069,54.724 31.716,54.693 31.364,54.661 31.012,54.627 30.66,54.591 30.308,54.554 29.957,54.515 29.606,54.475 29.254,54.434 28.903,54.391 28.552,54.346 28.201,54.3 27.851,54.253 27.5,54.205 27.15,54.155 26.799,54.104 26.449,54.052 26.099,53.998 25.749,53.944 25.399,53.888 25.049,53.832 24.7,53.774 24.35,53.715 24.001,53.655 23.651,53.594 23.302,53.533 22.953,53.47 22.604,53.406 22.255,53.342 21.906,53.277 21.557,53.211 21.208,53.144 20.859,53.077 20.511,53.008 20.162,52.94 19.814,52.87 19.465,52.8 19.117,52.729 18.768,52.658 18.42,52.586 18.072,52.514 17.724,52.442 17.376,52.369 17.027,52.295 16.679,52.221 16.331,52.147 15.983,52.073 15.635,51.998 15.287,51.923 14.939,51.848 14.591,51.772 14.244,51.697 13.896,51.621 13.548,51.545 13.2,51.47 12.852,51.394 0,51.394 -12.852,51.394 -13.2,51.47 -13.548,51.545 -13.896,51.621 -14.244,51.697 -14.592,51.772 -14.939,51.848 -15.287,51.923 -15.635,51.998 -15.983,52.073 -16.331,52.147 -16.679,52.221 -17.028,52.295 -17.376,52.369 -17.724,52.442 -18.072,52.514 -18.42,52.586 -18.769,52.658 -19.117,52.729 -19.465,52.8 -19.814,52.87 -20.162,52.94 -20.511,53.008 -20.859,53.077 -21.208,53.144 -21.557,53.211 -21.906,53.277 -22.255,53.342 -22.604,53.406 -22.953,53.47 -23.302,53.533 -23.651,53.594 -24.001,53.655 -24.35,53.715 -24.7,53.774 -25.049,53.832 -25.399,53.888 -25.749,53.944 -26.099,53.998 -26.449,54.052 -26.799,54.104 -27.15,54.155 -27.5,54.205 -27.851,54.253 -28.201,54.3 -28.552,54.346 -28.903,54.391 -29.254,54.434 -29.606,54.475 -29.957,54.515 -30.309,54.554 -30.66,54.591 -31.012,54.627 -31.364,54.661 -31.716,54.693 -32.069,54.724 -32.421,54.753 -32.774,54.781 -33.127,54.806 -33.48,54.83 -33.833,54.852 -34.186,54.872 -34.54,54.89 -34.894,54.905 -35.248,54.919 -35.602,54.93 -35.957,54.939 -36.312,54.945 -36.667,54.949 -37.022,54.95 -37.378,54.949 -37.734,54.945 -38.09,54.939 -38.447,54.93 -38.803,54.917 -39.16,54.902 -39.518,54.884 -39.875,54.863 -40.233,54.839 -40.591,54.812 -40.948,54.781 -41.306,54.748 -41.663,54.711 -42.02,54.67 -42.377,54.627 -42.733,54.58 -43.089,54.529 -43.444,54.475 -43.798,54.418 -44.152,54.357 -44.505,54.292 -44.857,54.223 -45.209,54.151 -45.559,54.075 -45.908,53.995 -46.256,53.911 -46.603,53.823 -46.948,53.732 -47.292,53.636 -47.635,53.536 -47.976,53.432 -48.315,53.324 -48.653,53.211 -48.989,53.094 -49.323,52.973 -49.655,52.848 -49.986,52.718 -50.314,52.583 -50.64,52.444 -50.964,52.301 -51.286,52.153 -51.605,52 -51.922,51.842 -52.237,51.68 -52.549,51.513 -52.858,51.341 -53.165,51.165 -53.47,50.984 -53.772,50.8 -54.072,50.61 -54.369,50.417 -54.664,50.22 -54.957,50.019 -55.247,49.813 -55.535,49.604 -55.82,49.392 -56.103,49.176 -56.384,48.956 -56.662,48.733 -56.938,48.506 -57.211,48.276 -57.483,48.043 -57.752,47.807 -58.018,47.568 -58.283,47.327 -58.545,47.082 -58.805,46.834 -59.062,46.584 -59.318,46.332 -59.571,46.077 -59.821,45.82 -60.07,45.56 -60.316,45.298 -60.56,45.035 -60.802,44.769 -61.042,44.501 -61.28,44.231 -61.515,43.96 -61.748,43.687 -61.979,43.413 -62.208,43.137 -62.435,42.86 -62.66,42.581 -62.882,42.301 -63.103,42.02 -63.321,41.738 -63.538,41.454 -63.752,41.169 -63.965,40.883 -64.175,40.595 -64.383,40.306 -64.59,40.017 -64.795,39.726 -64.998,39.434 -65.199,39.14 -65.398,38.846 -65.595,38.551 -65.791,38.254 -65.984,37.957 -66.177,37.658 -66.367,37.359 -66.556,37.058 -66.743,36.757 -66.928,36.454 -67.112,36.151 -67.294,35.846 -67.474,35.541 -67.653,35.235 -67.831,34.928 -68.006,34.621 -68.181,34.312 -68.354,34.003 -68.525,33.693 -68.695,33.382 -68.864,33.07 -69.031,32.758 -69.197,32.445 -69.362,32.132 -69.525,31.817 -69.687,31.502 -69.848,31.187 -70.007,30.87 -70.165,30.554 -70.322,30.236 -70.478,29.918 -70.632,29.6 -70.786,29.281 -70.938,28.961 -71.089,28.641 -71.239,28.32 -71.388,27.999 -71.536,27.677 -71.683,27.355 -71.828,27.032 -71.973,26.708 -72.116,26.385 -72.259,26.06 -72.4,25.735 -72.541,25.41 -72.68,25.085 -72.819,24.758 -72.957,24.432 -73.093,24.105 -73.229,23.777 -73.364,23.449 -73.498,23.121 -73.631,22.792 -73.764,22.463 -73.895,22.134 -74.026,21.804 -74.156,21.474 -74.285,21.143 -74.413,20.812 -74.541,20.481 -74.668,20.15 -74.794,19.818 -74.919,19.485 -75.044,19.153 -75.168,18.82 -75.291,18.487 -75.414,18.154 -75.536,17.82 -75.658,17.486 -75.778,17.152 -75.899,16.817 -76.019,16.482 -76.138,16.148 -76.256,15.812 -76.374,15.477 -76.492,15.141 -76.609,14.806 -76.726,14.47 -76.842,14.133 -76.958,13.797 -77.073,13.461 -77.188,13.124 -77.303,12.787 -77.417,12.45 -77.53,12.113 -77.644,11.776 -77.757,11.438 -77.87,11.101 -77.982,10.763 -78.094,10.426 -78.206,10.088 -78.318,9.75 -78.429,9.412 -78.541,9.074 -78.651,8.736 -78.762,8.398 -78.873,8.06 -78.983,7.722 -79.093,7.383 -79.202,7.045 -79.312,6.707 -79.421,6.368 -79.529,6.03 -79.638,5.691 -79.746,5.352 -79.854,5.013 -79.962,4.675 -80.069,4.336 -80.176,3.997 -80.283,3.658 -80.389,3.318 -80.495,2.979 -80.601,2.64 -80.706,2.3 -80.811,1.961 -80.916,1.621 -81.02,1.282 -81.124,0.942 -81.227,0.602 -81.33,0.262 -81.433,-0.078 -81.536,-0.418 -81.638,-0.758 -81.739,-1.098 -81.84,-1.438 -81.941,-1.779 -82.042,-2.119 -82.141,-2.46 -82.241,-2.8 -82.34,-3.141 -82.439,-3.482 -82.537,-3.823 -82.635,-4.164 -82.732,-4.505 -82.829,-4.846 -82.926,-5.187 -83.022,-5.529 -83.117,-5.87 -83.212,-6.212 -83.307,-6.554 -83.401,-6.895 -83.494,-7.237 -83.587,-7.579 -83.68,-7.921 -83.772,-8.263 -83.864,-8.606 -83.955,-8.948 -84.045,-9.291 -84.135,-9.633 -84.225,-9.976 -84.314,-10.319 -84.402,-10.661 -84.49,-11.004 -84.577,-11.347 -84.664,-11.691 -84.75,-12.034 -84.835,-12.377 -84.921,-12.721 -85.005,-13.064 -85.089,-13.408 -85.172,-13.752 -85.255,-14.096 -85.337,-14.44 -85.418,-14.784 -85.499,-15.129 -85.579,-15.473 -85.659,-15.817 -85.738,-16.162 -85.816,-16.507 -85.894,-16.852 -85.971,-17.197 -86.047,-17.542 -86.123,-17.887 -86.198,-18.232 -86.273,-18.578 -86.347,-18.923 -86.42,-19.269 -86.492,-19.615 -86.564,-19.961 -86.636,-20.307 -86.707,-20.653 -86.777,-21 -86.846,-21.347 -86.915,-21.693 -86.984,-22.04 -87.052,-22.387 -87.119,-22.735 -87.186,-23.082 -87.252,-23.43 -87.317,-23.778 -87.382,-24.126 -87.447,-24.474 -87.51,-24.822 -87.574,-25.171 -87.636,-25.519 -87.698,-25.868 -87.76,-26.217 -87.821,-26.567 -87.882,-26.916 -87.942,-27.266 -88.001,-27.616 -88.06,-27.966 -88.118,-28.317 -88.176,-28.667 -88.234,-29.018 -88.291,-29.369 -88.347,-29.72 -88.403,-30.072 -88.458,-30.424 -88.513,-30.776 -88.567,-31.128 -88.621,-31.481 -88.674,-31.833 -88.727,-32.186 -88.78,-32.54 -88.832,-32.893 -88.883,-33.247 -88.934,-33.601 -88.985,-33.955 -89.034,-34.31 -89.084,-34.665 -89.132,-35.02 -89.18,-35.375 -89.227,-35.731 -89.273,-36.086 -89.318,-36.442 -89.362,-36.798 -89.406,-37.154 -89.448,-37.51 -89.488,-37.866 -89.528,-38.222 -89.566,-38.579 -89.603,-38.935 -89.639,-39.292 -89.673,-39.648 -89.705,-40.005 -89.736,-40.362 -89.766,-40.718 -89.793,-41.075 -89.819,-41.431 -89.843,-41.788 -89.865,-42.144 -89.885,-42.5 -89.903,-42.857 -89.919,-43.213 -89.933,-43.569 -89.945,-43.925 -89.954,-44.281 -89.961,-44.636 -89.966,-44.992 -89.968,-45.347 -89.968,-45.702
  lines w0.508: 86,-70 91,-70 ; 91,55.885 91,-70 ; 91,56 -91,56 -91,-70 70,-70 91,-70

## Silkscreen, mask and mechanical layers (free items; w line width, h text height)
Top Overlay:
  lines w0.127: 0,-103.827 0,78.552

## Dimensions
-91,56 to 91,55.885 on Top Overlay
-91,56 to -91,-70 on Top Overlay

## Text inside footprints (layer, text, board x,y; h text height)
P3: Bottom Overlay "1" at -54.356,36.318 h1.27 r90; Bottom Overlay "2" at -56.896,36.576 h1.27 r90